# Altium PCB SFCMasterC.PcbDoc (part 2 of 2)
Units mm, origin at the board's own origin, x right, y up, seen from the top; angles counter-clockwise.
Board outline 152.4 x 101.6 mm, 2 copper layers (Top Layer, Bottom Layer); 178 components, 163 nets, 627 pads, 271 vias.
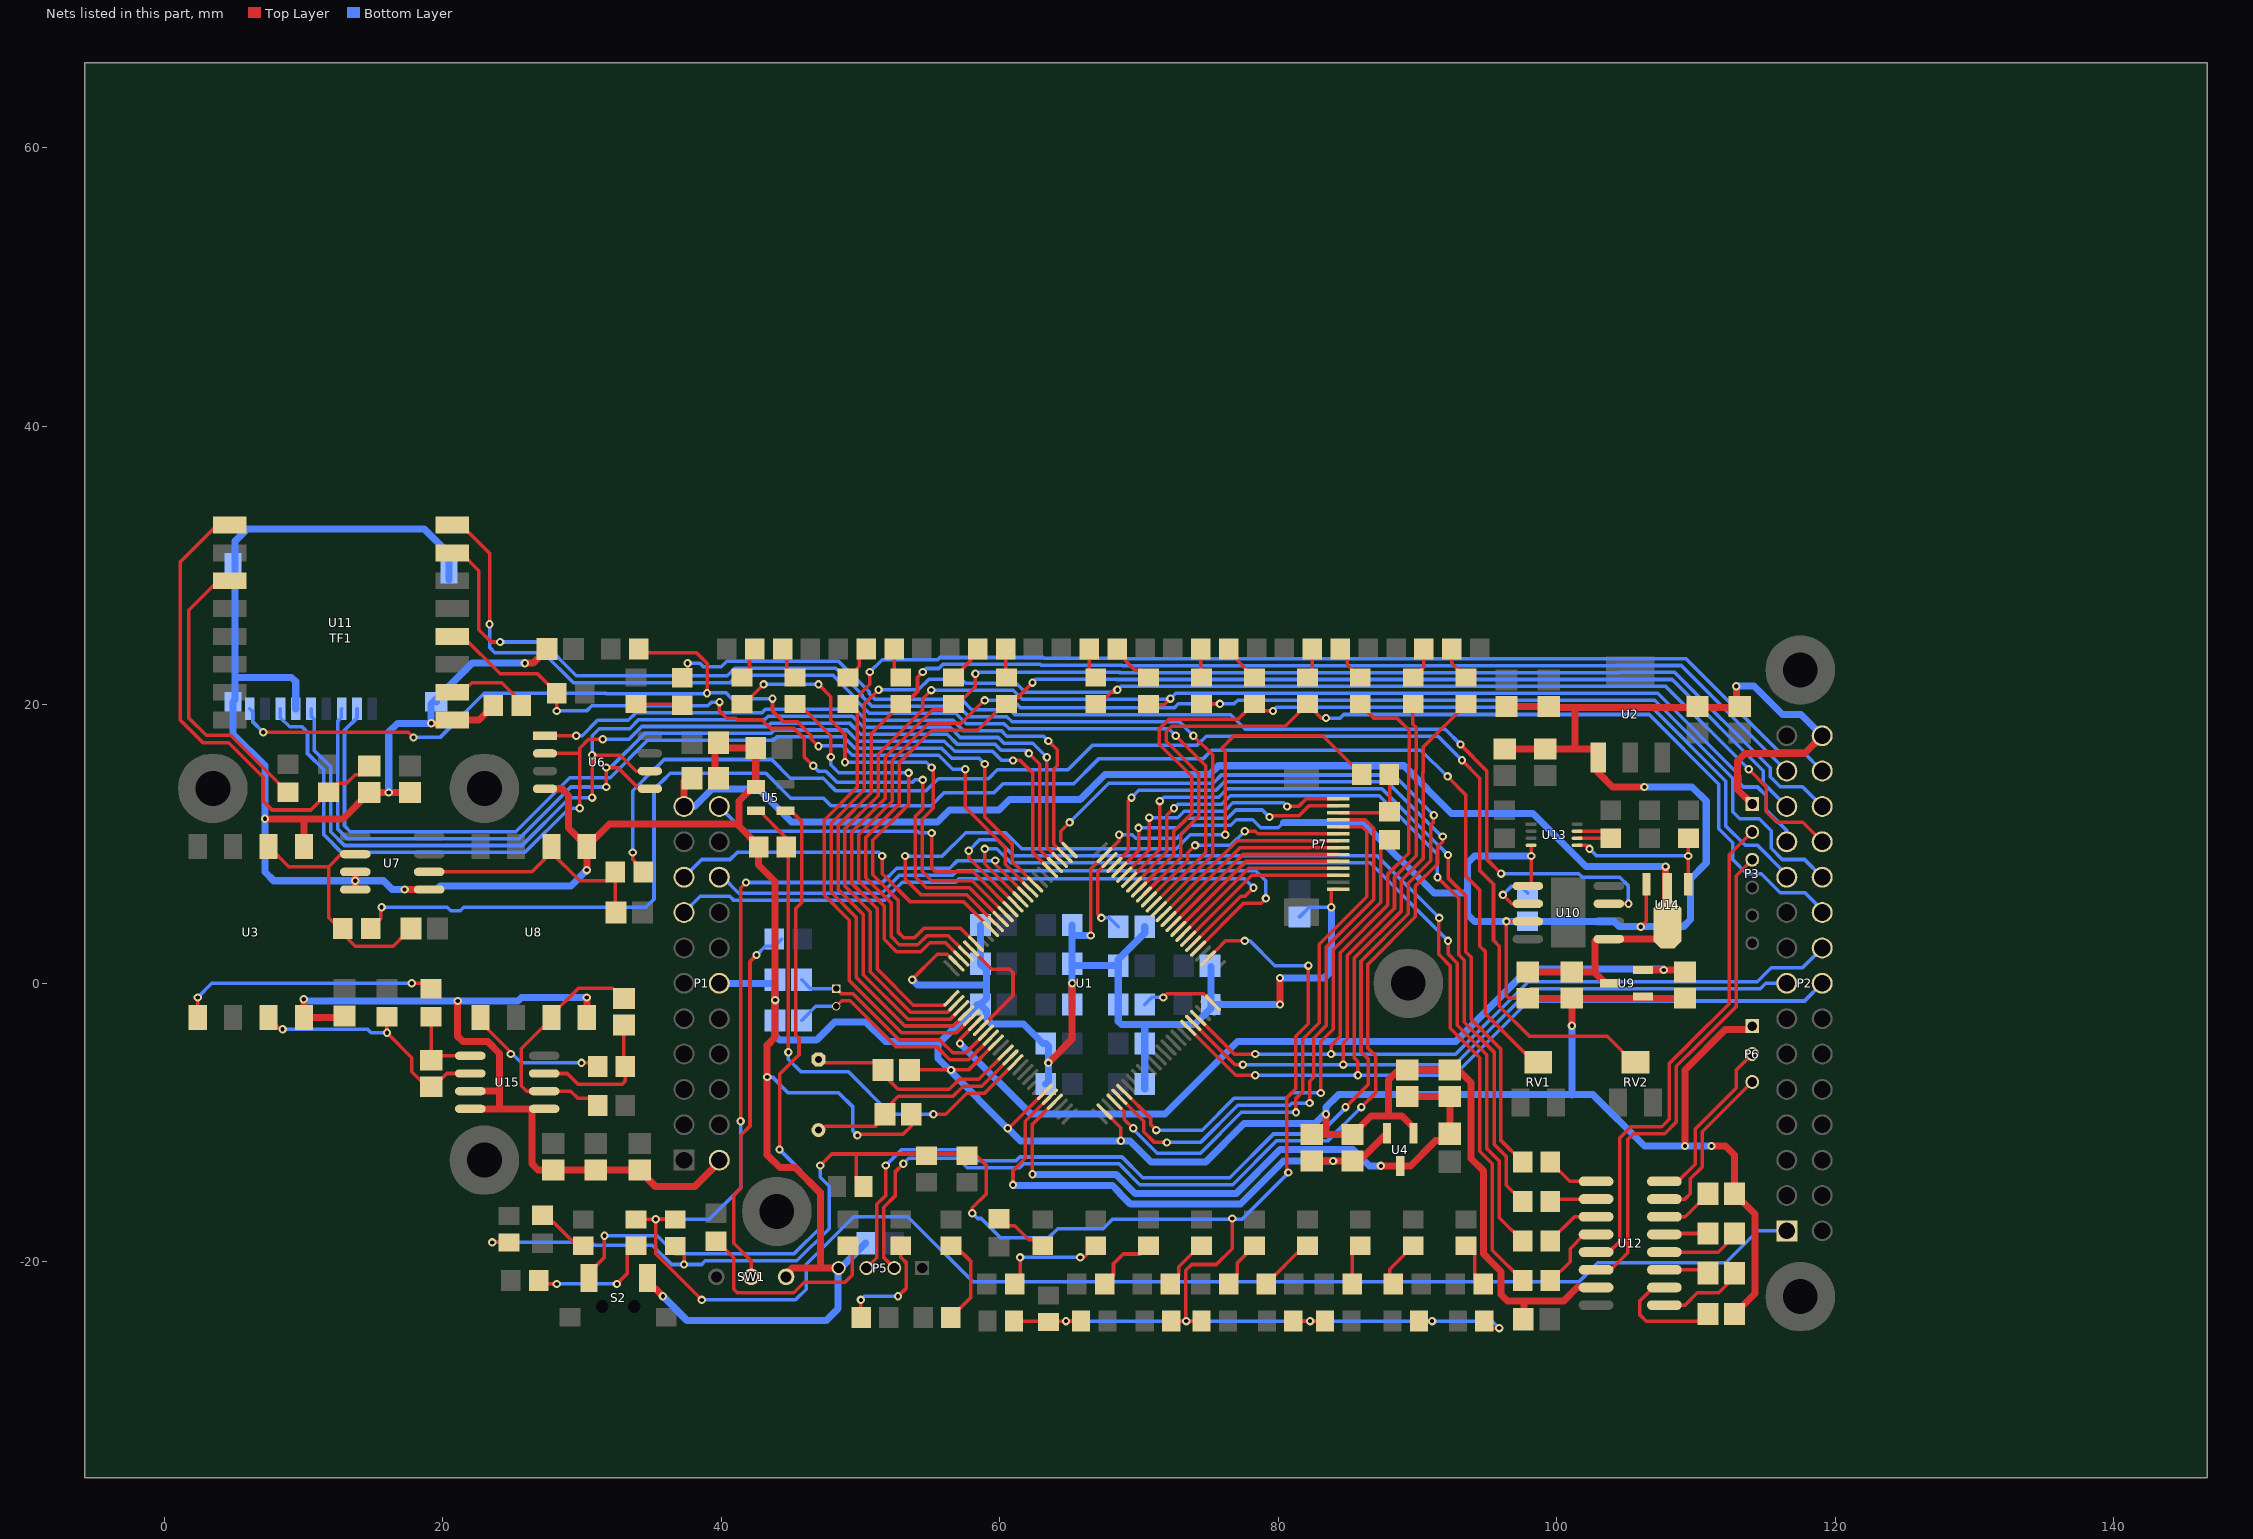
[diagram p2: the nets of this part, all layers, seen from the top]

## Via types
v1: diameter 0.6, hole 0.3, Top Layer to Bottom Layer, 269 vias
v2: diameter 1, hole 1, Top Layer to Bottom Layer, 2 vias

## Nets (pads, with @x,y where several pads share a name; then routed paths per layer and width w, separated by ;. In a path a pad name is that pad's centre, name@x,y a point inside that pad or via, vN(x,y) a via of type N, cw(c..) or ccw(c..) an arc to the next point about the centre after c; other vN are vias at no path point) (continued)
GND: C1.2 C2.2 C3.1 C4.1 C5.1 C6.1 C7.1 C8.1 C9.1 C10.1 C11.1 C12.1 C13.1 C14.1 C15.1 C16.1 C17.1 C18.1 C19.1 C20.2 C24.2 C28.1 C29.1 C30.1 C31.1 C32.2 C33.2 C34.2 C35.2 C36.1 C37.1 C39.1 C43.2 C50.2 C51.2 C52.2 C53.2 C54.2 C56.1 C58.2 C59.2 C60.2 P1.12 P2.30 P3.1 P5.4 P6.1 P7.1 R3.2 R5.2 R56.1 R65.1 S2.1 SW1.3 TF1.6 TF1.10 U1.10 U1.20 U1.27 U1.74 U1.99 U2.1 U3.5 U4.3 U5.1 U6.4 U7.3 U7.4 U7.5 U8.5 U9.1 U10.1 U10.3 U11.9 U12.15 U13.4 U14.3 | length 638.9
  Top Layer w0.254: v1(49.784,-10.922) 49.686,-10.824 53.087,-10.824 53.655,-10.256 C33.2@53.655,-9.906 ; C32.2@53.655,-6.731 54.163,-6.223 57.762,-6.223 U1.10@59.724,-4.26 ; v1@53.706,0.269 53.708,0.269 55.525,2.086 56.242,2.086 U1.99@56.896,1.432 ; v1@60.61,-10.445 U1.20@63.26,-7.796 ; v1@66.557,3.438 66.557,8.228 67.538,9.209 U1.74@67.538,9.21 67.608,9.28 67.609,9.28 68.58,10.251 v1(68.58,10.668) ; U1.27@67.538,-9.21 68.707,-10.379 v1(68.707,-11.303) ; v1@83.82,5.334 v1(83.82,5.461) 83.82,6.75 P7.1@84.325,6.75 ; v1@96.393,4.461 v1(96.393,4.445) ; C52.2@97.917,-1.077 97.917,-1.397 97.597,-1.077 96.581,-1.077 96.393,-0.889 v1(96.393,4.445) ; U10.3@97.93,4.445 v1(96.393,4.445) ; U10.1@98.171,7.112 U13.4@98.171,9.906 ; v1(106.045,4.064) 106.426,4.445 106.426,6.731 106.323,6.834 U14.3@106.323,7.107
  Top Layer w0.5: C43.2@39.685,16.891 C37.1@42.484,16.891 ; v1(83.439,-9.398) 83.439,-10.861 C29.1@82.423,-10.861 C28.1@85.344,-10.861 86.68,-9.525 87.91,-9.525 ; U4.3@89.723,-10.763 89.723,-10.348 88.9,-9.525 87.91,-9.525 ; C15.1@97.668,-24.13 97.668,-22.804 ; U12.15@102.772,-21.844 101.473,-21.844 100.513,-22.804 96.464,-22.804 96.012,-22.352 96.012,-20.701 95.009,-19.698 95.009,-19.673 94.764,-19.428 94.764,-13.484 93.853,-12.573 93.853,-7.112 92.964,-6.223 C30.1@89.281,-6.223 88.646,-6.223 87.91,-6.959 87.91,-9.525 ; v1(109.22,-11.684) 109.22,-6.223 112.141,-3.302 113.824,-3.302 P6.1@114.046,-3.08 P6.1@114.163,-3.08 ; v1(111.125,-11.684) 112.137,-11.684 112.776,-12.323 C58.2@112.776,-15.113 114.239,-16.576 114.239,-22.286 C56.1@112.776,-23.749 ; C16.1@112.903,19.812 v1(112.903,21.336)
  Top Layer w0.508: v1(7.239,11.811) 12.838,11.811 C51.2@14.732,13.705 C50.2@17.653,13.705 ; U3.5@10.033,9.833 10.033,11.805 ; U7.4@13.729,6.731 v1(13.729,7.366) U7.3@13.729,8.001 ; v1(17.272,6.731) U7.5@19.037,6.731 ; C50.2@17.526,13.716 C50.2@18.161,13.716 ; v1(19.177,18.669) 19.177,18.654 U11.9@20.954,18.654 ; U11.9@21.209,18.685 21.066,18.542 U11.9@20.954,18.654 ; R56.1@23.638,19.939 22.607,18.908 U11.9@20.7,18.908 U11.9@20.954,18.654 ; v1(25.908,22.987) 26.482,22.987 C20.2@27.498,24.003 ; U6.4@27.347,13.97 28.575,13.97 29.046,13.499 29.046,11.14 U8.5@30.353,9.833 ; v1(30.353,8.128) U8.5@30.353,9.833 ; S2.1@34.707,-21.16 34.707,-21.372 v1(35.814,-22.479) ; C24.2@39.558,14.859 C43.2@39.558,17.272 ; 41.275,11.451 31.971,11.451 U8.5@30.353,9.833 ; C37.1@42.484,16.891 42.484,14.29 41.275,13.081 41.275,11.295 42.688,9.882 42.688,8.493 43.881,7.3 v1(43.881,-1.206) 43.881,-3.871 43.307,-4.445 43.307,-12.319 44.219,-13.231 45.304,-13.231 47.149,-15.076 47.149,-20.447 ; SW1.3@44.664,-21.082 44.664,-20.868 45.085,-20.447 47.149,-20.447 ; P5.4@48.435,-20.447 47.149,-20.447 ; v1(63.5,-5.715) 65.212,-4.003 v1(65.212,0) ; v1(80.137,-1.524) v1(80.137,0.381) ; C59.2@96.266,16.825 C60.2@99.187,16.825 101.266,16.825 ; C19.1@96.393,19.878 C18.1@99.441,19.878 ; C52.2@97.917,-1.077 C54.2@101.092,-1.077 ; C18.1@99.441,20.193 99.695,19.939 99.949,19.939 100.076,19.812 101.332,19.812 ; v1(101.092,-3.048) C54.2@101.092,-1.077 ; v1(106.299,14.097) 104.013,14.097 102.983,15.127 U2.1@102.983,16.204 102.983,16.825 101.266,16.825 ; C53.2@109.22,-1.077 C54.2@101.092,-1.077 ; C16.1@113.157,19.812 101.332,19.812 ; P3.1@114.046,12.874 112.993,13.927 112.993,15.965 113.538,16.51 117.8,16.51 P2.30@119.07,17.78 ; 101.266,16.825 101.332,16.891 101.332,19.812
  Bottom Layer w0.254: v1(43.307,-6.731) 43.688,-6.731 44.831,-7.874 48.458,-7.874 49.466,-8.883 49.466,-10.604 v1(49.784,-10.922) ; v1(60.579,-10.414) v1@60.706,-10.541 ; v1(68.58,10.668) 69.519,10.668 69.773,10.414 72.741,10.414 73.686,11.359 76.607,11.359 76.988,11.74 78.176,11.74 78.74,11.176 80.01,11.176 80.391,11.557 ; C12.1@75.118,1.27 C12.1@75.168,1.22 ; C39.1@81.534,4.765 82.23,5.461 v1(83.82,5.461)
  Bottom Layer w0.5: v1@56.388,-6.223 v1(60.579,-10.414) ; v1@60.706,-10.541 61.492,-11.327 69.366,-11.327 70.866,-12.827 74.803,-12.827 77.564,-10.066 82.644,-10.066 83.439,-9.271 83.439,-8.89 84.328,-8.001 102.616,-8.001 106.299,-11.684 v1(111.125,-11.684) ; v1(112.903,21.336) 114.173,21.336 116.205,19.304 117.546,19.304 P2.30@119.07,17.78
  Bottom Layer w0.508: TF1.6@9.45,19.715 9.45,21.665 9.144,21.971 5.08,21.971 ; v1(16.129,13.705) 16.129,18.034 16.749,18.654 19.177,18.654 v1(19.177,18.669) 19.177,20.066 TF1.10@19.55,20.439 ; TF1.10@19.55,20.215 TF1.10@19.55,20.439 ; TF1.10@20.447,28.956 20.447,30.861 18.669,32.639 5.969,32.639 5.08,31.75 5.08,21.971 ; v1(25.908,22.987) 22.098,22.987 TF1.10@19.55,20.439 ; v1(30.353,8.128) 29.21,6.985 19.812,6.985 19.558,6.731 16.383,6.731 15.748,7.366 v1(13.729,7.366) 7.874,7.366 7.239,8.001 v1(7.239,11.811) 7.239,15.621 4.95,17.91 TF1.10@4.95,20.215 5.08,20.345 5.08,21.971 ; v1(35.814,-22.479) 37.565,-24.23 47.525,-24.23 48.387,-23.368 48.387,-20.64 C36.1@50.358,-18.669 ; P1.12@39.87,0 43.881,0 v1(43.881,-1.206) C35.2@43.881,-2.667 43.881,-3.749 44.196,-4.064 46.863,-4.064 48.133,-2.794 50.419,-2.794 51.816,-4.191 55.372,-4.191 55.562,-4.381 ; v1(53.721,0.254) 54.102,-0.127 59.055,-0.127 ; v1@56.388,-6.223 55.562,-5.397 55.562,-4.381 ; C13.1@58.613,4.191 C14.1@58.613,1.397 59.055,0.955 59.055,-0.127 ; C10.1@63.312,-7.239 63.5,-7.051 63.5,-4.506 C4.1@63.312,-4.318 63.119,-4.318 61.722,-2.921 59.436,-2.921 59.055,-2.54 59.055,-1.966 C9.1@58.613,-1.524 ; C3.1@65.212,-1.778 C3.1@65.212,-1.524 v1(65.212,0) C7.1@65.212,4.191 65.212,3.429 v1(66.548,3.429) ; C8.1@65.339,1.27 C6.1@68.519,1.27 C2.2@68.519,-1.524 68.519,-2.733 68.744,-2.958 74.004,-2.958 75.168,-1.794 R3.2@75.168,-1.524 ; C6.1@68.519,1.27 68.519,1.717 70.419,3.617 C1.2@70.419,4.064 ; C11.1@70.419,-7.595 C11.1@70.419,-7.239 C5.1@70.419,-4.318 70.419,-2.958 ; C12.1@75.168,1.22 R3.2@75.168,-1.524 ; v1(80.137,-1.524) R3.2@75.168,-1.524 ; v1(80.137,0.381) 83.312,0.381 83.82,0.889 v1(83.82,5.461) ; 80.391,11.557 86.106,11.557 91.186,6.477 93.599,6.477 ; v1(98.171,9.144) 94.107,9.144 93.599,8.636 93.599,6.477 ; 101.092,-8.001 v1(101.092,-3.048) ; v1(106.299,14.097) 109.728,14.097 110.744,13.081 110.744,8.636 109.601,7.493 109.601,4.572 109.093,4.064 v1(106.045,4.064) 104.521,4.064 104.14,4.445 v1(96.393,4.445) 94.107,4.445 93.599,4.953 93.599,6.477 ; 55.562,-4.381 58.42,-1.524 C9.1@58.613,-1.524 ; C9.1@58.613,-1.524 59.055,-1.082 59.055,-0.127
  other v1: 56.515,-6.223
GNDA: C23.1 C27.1 C38.1 C40.1 P1.2 U3.4 U8.4 U15.3 U15.4 U15.5 | length 61.7
  Top Layer w0.254: P1.2@39.87,-12.835 P1.2@39.87,-12.7
  Top Layer w0.508: v1(10.033,-1.143) U3.4@10.033,-2.467 12.707,-2.467 C23.1@12.827,-2.347 ; v1(21.082,-1.27) 21.082,-3.81 21.463,-4.191 23.241,-4.191 24.093,-5.043 24.093,-7.747 ; U15.4@21.984,-9.017 24.13,-9.017 ; U15.3@21.984,-7.747 24.093,-7.747 ; U8.4@30.353,-2.413 v1(30.353,-1.016) ; P1.2@39.87,-12.835 38.1,-14.605 35.306,-14.605 34.097,-13.396 26.858,-13.396 26.416,-12.954 26.416,-9.017 24.13,-9.017 ; 24.093,-7.747 24.093,-8.98 24.13,-9.017
  Bottom Layer w0.508: v1(10.033,-1.143) 10.033,-1.27 25.4,-1.27 25.654,-1.016 v1(30.353,-1.016)
KEY_DOWN: P7.4 U1.58 | length 13.1
  Top Layer w0.254: U1.58@73.195,3.553 77.29,7.648 77.291,7.648 77.893,8.25 P7.4@84.325,8.25
KEY_ENTER: P7.8 U1.62 | length 14.7
  Top Layer w0.254: U1.62@71.781,4.967 75.176,8.363 75.18,8.363 77.066,10.249 81.208,10.249 81.209,10.25 P7.8@84.325,10.25
KEY_INT: P7.9 U1.65 | length 16
  Top Layer w0.254: U1.65@70.72,6.028 73.506,8.814 73.506,9.371 v1(74.041,9.906) ; v1(77.597,10.922) 78.359,10.922 78.531,10.75 P7.9@84.325,10.75
  Bottom Layer w0.254: v1(74.041,9.906) 76.581,9.906 v1(77.597,10.922)
KEY_LEFT: P7.5 U1.59 | length 13.5
  Top Layer w0.254: U1.59@72.841,3.907 77.081,8.147 77.084,8.147 77.687,8.75 P7.5@84.325,8.75
KEY_RIGHT: P7.6 U1.60 | length 13.9
  Top Layer w0.254: U1.60@72.488,4.26 72.489,4.26 76.875,8.646 76.878,8.646 77.482,9.25 P7.6@84.325,9.25
KEY_UP: P7.3 U1.57 | length 12.7
  Top Layer w0.254: U1.57@73.548,3.2 78.099,7.75 P7.3@84.325,7.75
LCD_RESET: P7.7 U1.61 | length 14.3
  Top Layer w0.254: U1.61@72.134,4.614 75.384,7.864 75.387,7.864 77.273,9.75 P7.7@84.325,9.75
NetC1_1: C1.1 U1.73 | length 6.1
  Top Layer w0.254: v1(67.31,4.699) 67.056,4.953 67.056,8.021 U1.73@67.891,8.857
  Bottom Layer w0.254: v1(67.31,4.699) 67.884,4.699 C1.1@68.519,4.064
NetC2_1: C2.1 U1.49 | length 5.5
  Top Layer w0.254: v1(71.755,-1.016) 72.009,-0.762 74.646,-0.762 U1.49@75.316,-1.432
  Bottom Layer w0.254: C2.1@70.419,-1.524 70.927,-1.016 v1(71.755,-1.016)
NetC21_1: C21.1 R23.1 U8.3 U15.6 | length 18.9
  Top Layer w0.254: R23.1@31.004,-8.89 31.004,-8.398 30.861,-8.255 29.718,-8.255 29.21,-7.747 26.035,-7.747 25.654,-7.366 25.654,-4.699 27.813,-2.54 U8.3@27.813,-2.467 27.813,-2.286 29.755,-0.344 32.221,-0.344 33.02,-1.143 C21.1@33.02,-1.463
NetC21_2: C21.2 R21.1 U15.7 | length 9.9
  Top Layer w0.254: U15.7@27.305,-6.477 28.956,-6.477 29.718,-7.239 32.893,-7.239 33.131,-7.001 R21.1@33.131,-5.969 33.02,-5.858 C21.2@33.02,-3.363
NetC22_1: C22.1 R22.2 U3.6 U7.2 | length 18.1
  Top Layer w0.254: U3.6@7.493,9.833 8.944,8.382 11.811,8.382 ; U7.2@13.729,9.271 12.7,9.271 11.811,8.382 ; C22.1@17.719,3.556 17.338,3.556 16.449,2.667 13.732,2.667 12.843,3.556 12.843,3.667 11.811,4.699 11.811,8.382
NetC25_1: C25.1 R20.1 U3.3 U15.2 | length 18.7
  Top Layer w0.254: U3.3@7.493,-2.467 8.328,-3.302 v1(8.509,-3.302) ; R20.1@16.002,-2.397 v1(16.002,-3.556) 17.78,-5.334 17.78,-6.35 18.857,-7.427 C25.1@19.177,-7.427 19.353,-7.427 20.303,-6.477 U15.2@21.984,-6.477
  Bottom Layer w0.254: v1(8.509,-3.302) 14.605,-3.302 14.859,-3.556 v1(16.002,-3.556)
NetC25_2: C25.2 R19.1 U15.1 | length 6.1
  Top Layer w0.254: R19.1@19.177,-2.397 C25.2@19.177,-5.527 19.497,-5.207 U15.1@21.984,-5.207
NetC26_1: C26.1 R24.2 U7.6 U8.6 | length 18.4
  Top Layer w0.254: U7.6@19.037,8.001 26.416,8.001 U8.6@27.813,9.398 ; U8.6@27.813,9.833 U8.6@27.813,9.398 ; C26.1@32.451,5.08 32.401,5.13 R24.2@32.401,8.001 31.766,7.366 29.845,7.366 U8.6@27.813,9.398
NetC51_1: C51.1 R51.2 U11.1 | length 34.6
  Top Layer w0.254: U11.1@4.7,32.908 3.825,32.908 1.143,30.226 1.143,18.923 2.794,17.272 4.628,17.272 7.111,14.789 7.111,13.082 7.747,12.446 10.541,12.446 12.446,14.351 13.081,14.351 13.716,14.986 14.113,14.986 C51.1@14.732,15.605
NetC55_1: C55.1 U12.1 | length 6.2
  Top Layer w0.254: U12.1@107.672,-23.114 109.22,-23.114 110.109,-22.225 111.633,-22.225 112.776,-21.082 C55.1@112.776,-20.828
NetC55_2: C55.2 U12.3 | length 3.2
  Top Layer w0.254: U12.3@107.733,-20.574 110.622,-20.574 C55.2@110.876,-20.828
NetC56_2: C56.2 U12.2 | length 8.4
  Top Layer w0.254: U12.2@107.733,-21.844 106.934,-21.844 105.984,-22.794 105.984,-23.815 106.426,-24.257 110.368,-24.257 C56.2@110.876,-23.749
NetC57_1: C57.1 U12.5 | length 3.2
  Top Layer w0.254: U12.5@107.672,-17.968 C57.1@110.876,-17.968
NetC57_2: C57.2 U12.4 | length 5.8
  Top Layer w0.254: U12.4@107.672,-19.304 111.616,-19.304 112.776,-18.144 C57.2@112.776,-17.968
NetC58_1: C58.1 U12.6 | length 3.9
  Top Layer w0.254: U12.6@107.672,-16.764 109.225,-16.764 C58.1@110.876,-15.113
NetD1_1: D1.1 R4.1 | length 4.2
  Top Layer w0.254: R4.1@26.797,-16.653 27.289,-17.145 27.94,-17.145 29.645,-18.85 D1.1@30.1,-18.85
NetD2_1: D2.1 R6.1 | length 9
  Top Layer w0.254: R6.1@26.908,-21.336 27.162,-21.59 v1(28.194,-21.59) ; v1(32.512,-21.59) 33.274,-20.828 33.274,-19.476 D2.1@33.9,-18.85
  Bottom Layer w0.254: v1(28.194,-21.59) v1(32.512,-21.59)
NetD3_1: D3.1 R7.1 | length 15.4
  Top Layer w0.254: R7.1@39.624,-18.526 39.709,-18.526 40.894,-19.711 40.894,-21.971 41.148,-22.225 45.212,-22.225 45.974,-21.463 48.895,-21.463 49.403,-20.955 49.403,-19.153 D3.1@49.1,-18.85
NetD4_1: D4.1 R8.1 | length 8.9
  Top Layer w0.254: v1(50.038,-22.733) 50.038,-23.987 R8.1@50.054,-24.003 ; D4.1@52.451,-19.177 52.9,-18.728 D4.1@52.9,-18.85 52.9,-19.679 53.307,-20.086 53.307,-21.877 v1(52.705,-22.479)
  Bottom Layer w0.254: v1(50.038,-22.733) 50.292,-22.479 v1(52.705,-22.479)
NetD5_1: D5.1 R9.1 | length 6.5
  Top Layer w0.254: R9.1@56.499,-24.003 57.912,-22.59 57.912,-19.939 56.823,-18.85 D5.1@56.5,-18.85
NetD6_1: D6.1 R10.1 | length 4
  Top Layer w0.254: R10.1@59.944,-16.907 60.436,-17.399 61.087,-17.399 62.103,-18.415 62.665,-18.415 D6.1@63.1,-18.85 D6.1@63.043,-18.907
NetD7_1: D7.1 R11.1 | length 7.8
  Top Layer w0.254: R11.1@61.071,-21.59 61.468,-21.193 v1(61.468,-19.685) ; v1(65.786,-19.685) 66.065,-19.685 D7.1@66.9,-18.85
  Bottom Layer w0.254: v1(61.468,-19.685) v1(65.786,-19.685)
NetD8_1: D8.1 R26.2 | length 2.4
  Top Layer w0.254: D8.1@41.5,21.95 42.037,22.487 42.037,23.638 R26.2@42.402,24.003
NetD9_1: D9.1 R27.2 | length 2.4
  Top Layer w0.254: R27.2@44.407,24.003 44.704,23.706 44.704,22.546 D9.1@45.3,21.95
NetD10_1: D10.1 R28.2 | length 2.4
  Top Layer w0.254: D10.1@49.1,21.95 49.911,22.761 R28.2@49.911,24.003
NetD11_1: D11.1 R29.2 | length 2.3
  Top Layer w0.254: R29.2@52.418,24.003 52.418,22.432 D11.1@52.9,21.95
NetD12_1: D12.1 R30.2 | length 2.6
  Top Layer w0.254: D12.1@56.7,21.95 57.912,23.162 R30.2@57.912,24.003
NetD13_1: D13.1 R31.2 | length 2.1
  Top Layer w0.254: R31.2@60.429,24.003 60.429,22.021 D13.1@60.5,21.95
NetD14_1: D14.1 R38.2 | length 2.2
  Top Layer w0.254: R38.2@66.434,24.003 66.434,22.416 D14.1@66.9,21.95
NetD15_1: D15.1 R39.2 | length 3.3
  Top Layer w0.254: R39.2@68.44,24.003 68.44,23.762 69.723,22.479 70.171,22.479 D15.1@70.7,21.95
NetD16_1: D16.1 R40.2 | length 2.1
  Top Layer w0.254: R40.2@74.445,24.003 74.445,22.005 D16.1@74.5,21.95
NetD17_1: D17.1 R41.2 | length 2.8
  Top Layer w0.254: R41.2@76.45,24.003 76.45,23.8 D17.1@78.3,21.95
NetD18_1: D18.1 R42.2 | length 2.2
  Top Layer w0.254: D18.1@82.1,21.95 82.456,22.306 R42.2@82.456,24.003
NetD19_1: D19.1 R43.2 | length 2.6
  Top Layer w0.254: R43.2@84.461,24.003 84.963,23.501 84.963,22.887 D19.1@85.9,21.95
NetD20_1: D20.1 R48.2 | length 2.4
  Top Layer w0.254: D20.1@89.7,21.95 90.467,22.717 R48.2@90.467,24.003
NetD21_1: D21.1 R49.2 | length 2.5
  Top Layer w0.254: R49.2@92.472,24.003 92.472,22.978 D21.1@93.5,21.95
NetD24_1: D24.1 R12.1 | length 4.8
  Top Layer w0.254: R12.1@67.548,-21.59 67.564,-21.59 68.177,-20.977 68.177,-20.144 68.881,-19.44 70.11,-19.44 D24.1@70.7,-18.85
NetD25_2: D25.2 R54.1 | length 3.6
  Top Layer w0.254: D25.2@33.639,20.05 D25.2@33.9,20.05 R54.1@37.211,20.05
NetD26_1: D26.1 R13.1 | length 3.7
  Top Layer w0.254: R13.1@72.247,-21.59 72.867,-20.97 72.867,-20.351 D26.1@74.434,-18.784
NetD27_1: D27.1 R14.1 | length 3.5
  Top Layer w0.254: R14.1@76.438,-21.59 76.438,-21.479 77.067,-20.85 77.067,-20.083 D27.1@78.3,-18.85
NetD28_1: D28.1 R15.1 | length 4.1
  Top Layer w0.254: R15.1@79.137,-21.59 81.877,-18.85 D28.1@82.1,-18.85
NetD29_1: D29.1 R16.1 | length 3
  Top Layer w0.254: R16.1@85.328,-21.59 85.328,-19.422 D29.1@85.9,-18.85
NetD30_1: D30.1 R17.1 | length 3.4
  Top Layer w0.254: R17.1@88.027,-21.59 88.027,-20.523 D30.1@89.7,-18.85
NetD31_1: D31.1 R18.1 | length 3.1
  Top Layer w0.254: D31.1@93.5,-18.85 94.116,-19.466 94.116,-21.361 R18.1@94.345,-21.59
NetR2_2: R2.2 SW1.2 | length 26.6
  Top Layer w0.254: SW1.2@42.164,-21.082 42.164,-19.939 40.894,-18.669 40.894,-15.24 41.402,-14.732 41.402,-10.922 42.074,-10.25 42.074,1.561 v1(42.545,2.032)
  Bottom Layer w0.254: v1(42.545,2.032) 43.18,2.667 43.831,2.667 R2.2@44.339,3.175
NetR19_2: R19.2 U3.1 | length 18.8
  Top Layer w0.254: U3.1@2.413,-2.467 v1(2.413,-1.016) ; v1(17.78,0) 18.78,0 R19.2@19.177,-0.397
  Bottom Layer w0.254: v1(2.413,-1.016) 3.429,0 v1(17.78,0)
NetR21_2: R21.2 U8.1 | length 10.3
  Top Layer w0.254: U8.1@22.733,-2.467 22.733,-2.794 24.892,-4.953 v1(24.892,-5.08) ; v1(29.972,-5.715) 30.877,-5.715 R21.2@31.131,-5.969
  Bottom Layer w0.254: v1(24.892,-5.08) 24.892,-4.953 25.654,-5.715 v1(29.972,-5.715)
NetR22_1: R22.1 RV1.2 | length 114.5
  Top Layer w0.254: R22.1@14.843,3.556 R22.1@14.843,3.937 15.557,4.651 15.557,5.397 15.621,5.334 v1(15.621,5.461) ; v1@92.138,14.859 93.472,13.525 93.472,7.705 94.461,6.716 94.461,6.702 94.469,6.694 94.469,2.672 94.887,2.254 94.887,-2.177 98.372,-5.662 RV1.2@98.679,-5.662
  Bottom Layer w0.254: v1(15.621,5.461) 20.32,5.461 20.574,5.207 21.265,5.207 21.51,5.452 34.591,5.452 35.179,6.04 35.179,13.926 35.74,14.487 35.752,14.487 36.339,15.074 43.219,15.074 44.995,13.298 47.352,13.298 47.894,12.756 55.082,12.756 56.023,13.697 59.61,13.697 60.246,14.333 60.267,14.333 60.268,14.332 65.319,14.332 66.918,15.931 66.922,15.931 67.101,16.11 74.606,16.11 75.242,16.746 90.251,16.746 92.138,14.859 v1(92.17,14.859)
NetR24_1: R24.1 RV2.2 | length 100
  Top Layer w0.254: v1(33.655,9.398) 33.655,8.89 34.401,8.144 R24.1@34.401,8.001 ; v1(93.204,16.016) 94.488,14.732 94.488,8.1 95.459,7.129 95.459,7.115 95.467,7.107 95.467,3.085 95.885,2.667 95.885,-1.651 98.048,-3.814 103.636,-3.814 RV2.2@105.574,-5.752
  Bottom Layer w0.254: v1(33.655,9.398) 33.655,13.839 35.31,15.494 35.348,15.494 35.926,16.072 43.632,16.072 44.972,14.732 47.329,14.732 48.218,13.843 54.732,13.843 55.584,14.695 59.196,14.695 59.832,15.331 60.681,15.331 60.682,15.33 64.906,15.33 66.505,16.929 66.508,16.929 66.687,17.108 74.192,17.108 74.828,17.744 91.476,17.744 v1(93.204,16.016)
NetR53_2: R53.2 U11.3 | length 20.9
  Top Layer w0.254: U11.3@4.7,28.908 3.889,28.908 1.778,26.797 1.778,19.05 3.017,17.811 4.795,17.811 R53.2@8.89,13.716
NetR54_2: R54.2 U10.7 | length 82.2
  Top Layer w0.254: R54.2@37.211,21.955 37.592,22.336 v1(37.592,22.987) ; v1(93.091,17.145) 94.996,15.24 94.996,8.89 v1(96.012,7.874) ; U10.7@103.746,5.715 v1(105.156,5.715)
  Bottom Layer w0.254: v1(37.592,22.987) 38.481,22.987 38.735,22.733 40.005,22.733 40.405,23.133 48.434,23.133 50.636,20.931 50.636,20.804 51.058,20.382 55.368,20.382 55.37,20.384 57.271,20.384 58.007,19.648 60.73,19.648 61.102,19.276 76.609,19.276 77.642,18.243 91.993,18.243 v1(93.091,17.145) ; v1(96.012,7.874) 101.6,7.874 101.854,7.62 104.521,7.62 105.156,6.985 v1(105.156,5.715)
NetR56_2: R56.2 U11.10 | length 6.7
  Top Layer w0.254: U11.10@20.019,20.908 U11.10@20.7,20.908 21.416,20.908 22.098,21.59 24.257,21.59 25.638,20.209 R56.2@25.638,19.939
NetR57_2: R57.2 U12.11 | length 3.9
  Top Layer w0.254: R57.2@99.552,-18.5 101.288,-16.764 U12.11@102.772,-16.764
NetR58_2: R58.2 U12.12 | length 5.1
  Top Layer w0.254: R58.2@99.618,-21.336 100.965,-19.989 100.965,-19.05 101.981,-18.034 U12.12@102.772,-18.034
NetR59_2: R59.2 U12.10 | length 3.3
  Top Layer w0.254: R59.2@99.552,-15.663 99.721,-15.494 U12.10@102.772,-15.494
NetR60_1: R60.1 U12.9 | length 3.8
  Top Layer w0.254: R60.1@99.552,-12.827 100.949,-14.224 U12.9@102.772,-14.224
NetR62_2: R62.2 U13.6 U13.7 | length 5
  Top Layer w0.254: U13.6@101.473,10.414 103.87,10.414 103.87,10.446 103.394,10.922 U13.7@101.473,10.922
NetR65_2: R65.2 U10.2 | length 4.3
  Top Layer w0.254: v1(96.139,6.35) 96.774,5.715 U10.2@97.93,5.715
  Bottom Layer w0.254: v1(96.139,6.35) 96.774,6.985 97.393,6.985 R65.2@97.917,6.461
NetS2_2: S2.2 U5.3 | length 53.1
  Top Layer w0.254: S2.2@30.507,-21.16 30.507,-20.801 31.623,-19.685 v1(31.623,-18.133) ; v1(44.196,-11.938) 44.196,-6.538 45.593,-5.141 45.593,-3.951 45.366,-3.724 45.366,5.371 45.773,5.778 45.773,11.631 45.019,12.385 U5.3@44.611,12.385
  Bottom Layer w0.254: v1(31.623,-18.133) 35.405,-18.133 36.703,-19.431 45.234,-19.431 47.253,-17.412 47.253,-14.995 v1(44.196,-11.938)
PORT_INT: D32.1 D33.1 D34.1 D35.1 D36.1 D37.1 D38.1 D39.1 D40.1 D41.1 D42.1 D43.1 D44.1 D45.1 U1.53 | length 153
  Top Layer w0.254: v1(23.561,-18.603) D32.1@24.765,-18.603 ; D33.1@36.703,-18.857 37.338,-19.492 v1(37.338,-20.193) ; v1(47.117,-13.081) 47.94,-12.258 49.718,-12.258 ; D34.1@50.48,-14.859 49.718,-14.097 49.718,-12.258 ; D36.1@56.962,-12.258 49.718,-12.258 ; v1(58.039,-16.51) 58.039,-16.13 59.055,-15.114 59.055,-13.081 D36.1@58.214,-12.24 ; D37.1@61.148,-24.257 D39.1@65.471,-24.257 ; D40.1@72.324,-24.257 v1(73.406,-24.257) ; D41.1@74.615,-24.257 D41.1@74.488,-24.257 v1(73.406,-24.257) ; U1.53@74.963,1.785 75.586,2.409 76.225,3.048 v1(77.597,3.048) ; v1@76.708,-16.764 76.708,-19.05 75.565,-20.193 73.787,-20.193 73.366,-20.614 73.366,-24.217 v1(73.406,-24.257) ; v1(80.735,-13.589) 80.608,-13.462 80.608,-8.236 81.261,-7.583 81.261,-3.815 82.169,-2.907 v1(82.169,1.27) ; D42.1@81.468,-24.257 D43.1@83.251,-24.257 ; D44.1@90.231,-24.257 v1@91.099,-24.257 ; D45.1@94.803,-24.257 95.311,-24.765 v1(95.885,-24.765)
  Bottom Layer w0.254: v1(23.561,-18.603) 30.668,-18.603 30.87,-18.805 35.061,-18.805 36.449,-20.193 38.608,-20.193 38.871,-19.93 45.441,-19.93 47.752,-17.619 47.752,-14.563 47.117,-13.928 v1(47.117,-13.081) ; v1@58.039,-16.491 58.439,-16.891 58.674,-16.891 60.072,-18.289 63.494,-18.289 64.166,-17.617 67.431,-17.617 68.12,-16.928 77.433,-16.928 v1@80.772,-13.589 ; v1(64.77,-24.257) v1(73.406,-24.257) v1(82.296,-24.257) v1(91.059,-24.257) 95.377,-24.257 v1(95.885,-24.765) ; v1(77.597,3.048) 77.978,3.048 79.756,1.27 v1@82.232,1.27
  other v1: 76.708,-16.891
RCC_OSC32_IN: C34.1 U1.8 Y2.1 | length 16
  Top Layer w0.254: Y2.1@48.26,-0.381 48.641,-0.762 49.474,-0.762 52.785,-4.073 55.706,-4.073 56.623,-4.99 57.58,-4.99 U1.8@59.017,-3.553
  Bottom Layer w0.254: C34.1@45.781,0.254 46.416,-0.381 Y2.1@48.26,-0.381
RCC_OSC32_OUT: C35.1 U1.9 Y2.2 | length 16.6
  Top Layer w0.254: Y2.2@48.26,-1.651 48.65,-1.261 49.267,-1.261 52.578,-4.572 55.499,-4.572 56.416,-5.489 57.787,-5.489 58.523,-4.753 58.525,-4.753 U1.9@59.371,-3.907
  Bottom Layer w0.254: C35.1@45.781,-2.667 46.797,-1.651 Y2.2@48.26,-1.651
RCC_OSC_IN: C32.1 U1.12 Y1.1 | length 15.5
  Top Layer w0.254: Y1.1@46.99,-5.715 51.054,-5.715 51.816,-6.477 51.816,-6.731 52.704,-7.619 56.389,-7.619 57.114,-6.894 58.503,-6.894 60.43,-4.967 U1.12@60.431,-4.967
RCC_OSC_OUT: C33.1 U1.13 Y1.2 | length 16.4
  Top Layer w0.254: Y1.2@46.99,-10.795 47.535,-10.25 51.091,-10.25 51.689,-9.652 51.689,-9.144 52.715,-8.118 56.652,-8.118 57.377,-7.393 58.71,-7.393 60.607,-5.496 60.609,-5.496 60.784,-5.321 U1.13@60.785,-5.321
RCT_AF: U1.7 U1.96 | length 9.3
  Top Layer w0.254: U1.96@57.516,2.93 57.519,2.93 U1.96@57.957,2.493 59.433,1.016 60.706,1.016 60.96,0.762 60.96,-0.903 U1.7@58.664,-3.2
RMT_STARTUP_IN: D2.2 D33.2 P2.1 U1.85 | length 146.6
  Top Layer w0.254: D2.2@33.909,-16.941 D2.2@33.9,-16.95 v1(35.306,-16.95) ; D33.2@37.084,-17.018 36.764,-17.018 D33.2@36.703,-16.957 36.696,-16.95 v1(35.306,-16.95) ; v1(38.608,-22.733) 35.306,-19.431 v1(35.306,-16.95) ; v1(41.402,-9.906) 41.402,6.858 v1(41.783,7.239) ; v1(59.69,8.816) 59.69,8.539 U1.85@61.846,6.383
  Bottom Layer w0.254: v1(35.306,-16.95) 39.156,-16.95 41.402,-14.704 v1(41.402,-9.906) ; v1(38.608,-22.733) 45.339,-22.733 46.11,-21.962 46.11,-20.184 49.53,-16.764 53.411,-16.764 58.093,-21.446 101.576,-21.446 102.947,-20.075 112.153,-20.075 114.448,-17.78 116.304,-17.78 116.53,-18.006 P2.1@116.53,-17.78 ; v1(41.783,7.239) 51.584,7.239 52.6,8.255 56.416,8.255 56.977,8.816 v1(59.69,8.816)
RS232_EXT_RXD1: P3.2 U12.13 | length 36.8
  Top Layer w0.254: U12.13@102.772,-19.37 103.693,-19.37 104.521,-18.542 104.521,-11.105 105.33,-10.296 107.56,-10.296 108.099,-9.757 108.099,-5.759 109.54,-4.318 109.54,-4.314 112.395,-1.458 112.395,9.223 P3.2@114.046,10.874
RS232_EXT_TXD1: P3.3 U12.14 | length 36.1
  Top Layer w0.254: U12.14@102.772,-20.574 103.886,-20.574 105.119,-19.341 105.119,-11.213 105.537,-10.795 107.767,-10.795 108.598,-9.964 108.598,-5.965 110.039,-4.525 110.039,-4.52 112.894,-1.665 112.894,7.722 P3.3@114.046,8.874
RS232_PC_RXD2: P6.2 U12.8 | length 12.3
  Top Layer w0.254: U12.8@107.733,-14.224 108.712,-14.224 109.954,-12.982 109.954,-10.466 112.903,-7.517 112.903,-6.223 P6.2@114.046,-5.08
RS232_PC_TXD2: P6.3 U12.7 | length 12
  Top Layer w0.254: U12.7@107.672,-15.494 109.22,-15.494 109.601,-15.113 109.601,-14.041 110.453,-13.189 110.453,-10.673 P6.3@114.046,-7.08
SPI1_LCD_A0: P7.13 U1.71 | length 19
  Top Layer w0.254: U1.71@68.599,8.149 69.977,9.528 v1(69.977,11.16) ; v1(79.375,11.938) 79.465,12.028 81.497,12.028 82.218,12.749 84.324,12.749 P7.13@84.325,12.75
  Bottom Layer w0.254: v1(69.977,11.16) 69.977,11.176 72.776,11.176 73.464,11.864 76.364,11.864 76.946,12.446 78.867,12.446 v1(79.375,11.938)
SPI1_LCD_BL: P7.14 U1.70 | length 19.2
  Top Layer w0.254: U1.70@68.952,7.796 70.739,9.583 v1(70.739,11.901) ; v1(80.645,12.7) 81.463,12.7 82.013,13.25 P7.14@84.325,13.25
  Bottom Layer w0.254: v1(70.739,11.901) 72.795,11.901 73.189,12.295 73.189,12.3 73.252,12.363 76.158,12.363 76.749,12.954 80.391,12.954 v1(80.645,12.7)
SPI1_LCD_MISO: R32.1 U1.31 | length 36.8
  Top Layer w0.254: U1.31@68.952,-7.796 70.866,-9.71 70.866,-10.16 v1(71.247,-10.541) ; v1(83.058,-7.874) 83.058,-4.191 83.947,-3.302 83.947,2.399 87.358,5.81 87.358,9.65 R32.1@88.011,10.303
  Bottom Layer w0.254: v1(71.247,-10.541) 74.549,-10.541 76.835,-8.255 80.589,-8.255 80.97,-7.874 v1(83.058,-7.874)
SPI1_LCD_MOSI: R25.1 U1.91 | length 52.5
  Top Layer w0.254: v1(53.213,9.144) 53.213,7.493 54.356,6.35 57.635,6.35 U1.91@59.724,4.26 ; v1(76.2,10.668) 76.2,16.637 75.946,16.891 76.835,17.78 83.201,17.78 R25.1@85.995,14.986 85.995,14.843 R25.1@86.233,14.605
  Bottom Layer w0.254: v1(53.213,9.144) 53.232,9.125 55.861,9.125 57.559,10.823 59.413,10.823 59.414,10.822 60.425,10.822 61.595,9.652 72.685,9.652 73.701,10.668 v1(76.2,10.668)
SPI1_LCD_NSS: P7.10 U1.29 | length 40.5
  Top Layer w0.254: U1.29@68.245,-8.503 68.961,-9.219 68.961,-9.779 v1(69.596,-10.414) ; v1(81.28,-9.271) 81.28,-8.269 81.76,-7.789 81.76,-4.021 82.94,-2.841 82.94,2.803 86.36,6.223 86.36,10.922 86.032,11.25 P7.10@84.325,11.25
  Bottom Layer w0.254: v1@69.596,-10.475 71.313,-12.192 74.422,-12.192 77.343,-9.271 v1(81.28,-9.271)
SPI1_LCD_SCK: P7.11 U1.30 | length 41.1
  Top Layer w0.254: U1.30@68.599,-8.149 70.358,-9.909 70.358,-10.668 71.12,-11.43 v1(72.009,-11.43) ; v1(82.259,-8.599) 82.259,-7.022 82.55,-6.731 82.55,-3.937 83.439,-3.048 83.439,2.596 86.859,6.016 86.859,11.129 86.238,11.75 P7.11@84.325,11.75
  Bottom Layer w0.254: v1(72.009,-11.43) 74.422,-11.43 77.089,-8.763 80.838,-8.763 81.002,-8.599 v1(82.259,-8.599)
SPI1_LCD_SDA: P7.12 R25.2 R32.2 | length 6.4
  Top Layer w0.254: P7.12@84.325,12.25 R32.2@88.011,12.25 ; R25.2@87.995,14.986 88.011,14.97 R32.2@88.011,12.303
SPI3_FLASH_NSS: U1.77 U6.1 | length 46.8
  Top Layer w0.254: U6.1@27.347,17.78 v1(29.591,17.78) ; v1(63.5,17.399) 64.135,16.764 64.135,15.621 63.891,15.377 63.891,11.421 ; U1.77@64.674,9.21 63.89,9.994 63.89,11.42 ; 63.89,11.42 63.891,11.421
  Bottom Layer w0.254: v1(29.591,17.78) 30.028,17.78 31.126,18.878 33.327,18.878 33.889,19.44 42.935,19.44 43.181,19.686 49.637,19.686 50.438,18.885 55.988,18.885 55.99,18.887 56.65,18.887 57.386,18.151 60.11,18.151 60.517,17.744 63.155,17.744 v1(63.5,17.399)
SPI3_MISO: TF1.7 U1.79 U6.2 | length 80.6
  Top Layer w0.254: U6.2@27.347,16.51 29.845,16.51 ; v1(29.845,12.573) 29.845,16.891 30.48,17.526 v1(31.496,17.526) ; v1(62.103,16.51) 62.893,15.72 62.893,11.834 62.892,11.833 62.892,9.579 U1.79@63.967,8.503
  Bottom Layer w0.254: TF1.7@8.35,19.715 8.35,19.082 9.017,18.415 9.906,18.415 10.296,18.025 10.296,16.501 11.457,15.34 11.457,10.683 12.742,9.398 25.908,9.398 29.083,12.573 v1(29.845,12.573) ; v1(31.496,17.526) 33.387,17.526 34.303,18.442 43.348,18.442 43.594,18.688 49.223,18.688 50.024,17.887 56.239,17.887 56.973,17.153 59.696,17.153 60.103,16.746 61.867,16.746 v1(62.103,16.51)
SPI3_MOSI: TF1.3 U1.80 U6.5 | length 75.5
  Top Layer w0.254: v1(31.75,14.097) v1(31.75,15.494) 32.576,15.494 34.1,13.97 U6.5@34.883,13.97 ; v1(60.96,16.002) 61.468,16.002 62.394,15.076 62.394,12.041 62.393,12.04 62.393,9.37 U1.80@63.613,8.149
  Bottom Layer w0.254: TF1.3@12.75,19.715 12.709,19.674 12.709,19.059 12.455,18.805 12.455,11.096 13.155,10.396 25.495,10.396 29.196,14.097 v1(31.75,14.097) ; v1(31.75,15.494) 32.06,15.494 34.509,17.943 43.555,17.943 43.801,18.189 49.016,18.189 49.817,17.388 56.032,17.388 56.766,16.654 59.49,16.654 60.142,16.002 v1(60.96,16.002)
SPI3_SCK: TF1.5 U1.78 U6.6 | length 81.3
  Top Layer w0.254: v1(30.734,13.335) v1(30.734,16.383) 32.766,16.383 33.909,15.24 U6.6@34.883,15.24 ; v1(63.392,16.237) 63.392,11.627 63.391,11.626 63.391,9.786 U1.78@64.321,8.857
  Bottom Layer w0.254: TF1.5@10.55,19.715 10.55,19.168 10.795,18.923 10.795,16.708 11.956,15.547 11.956,10.89 12.949,9.897 25.701,9.897 29.139,13.335 v1(30.734,13.335) ; v1(30.734,16.383) 30.734,17.78 31.242,18.288 33.443,18.288 34.096,18.941 43.142,18.941 43.388,19.187 49.43,19.187 50.231,18.386 56.195,18.386 56.197,18.388 56.444,18.388 57.18,17.652 59.903,17.652 60.31,17.245 62.384,17.245 v1(63.392,16.237)
SPI3_TF_CD: R1.1 TF1.9 U1.84 | length 75.1
  Top Layer w0.254: v1(7.112,18.034) 17.526,18.034 v1(17.907,17.653) ; R1.1@34.091,24.003 34.345,23.749 38.227,23.749 38.989,22.987 v1(38.989,20.828) ; v1(43.688,20.447) 43.688,19.558 44.45,18.796 45.466,18.796 46.482,17.78 46.482,17.526 v1(46.99,17.018) v1@47.117,16.891 ; v1(57.531,15.367) 57.531,12.631 60.397,9.765 60.397,8.537 U1.84@62.199,6.735
  Bottom Layer w0.254: TF1.9@6.15,19.715 6.35,19.515 6.35,18.796 v1(7.112,18.034) ; v1(17.907,17.653) 19.812,17.653 22.987,20.828 31.75,20.828 31.769,20.809 38.97,20.809 39.026,20.865 40.349,20.865 40.767,20.447 v1(43.688,20.447) ; v1@47.117,17.074 48.72,17.074 49.411,16.383 55.626,16.383 56.642,15.367 v1(57.531,15.367)
SPI3_TF_NSS: TF1.2 U1.83 | length 68.7
  Top Layer w0.254: v1(58.928,15.748) 58.928,11.94 60.896,9.972 60.896,8.746 U1.83@62.553,7.089
  Bottom Layer w0.254: TF1.2@13.85,19.715 13.85,19.057 12.954,18.161 12.954,11.303 13.362,10.895 25.246,10.895 29.12,14.769 32.041,14.769 34.716,17.444 43.762,17.444 44.008,17.69 48.81,17.69 49.611,16.889 55.826,16.889 56.56,16.155 58.521,16.155 v1(58.928,15.748)
SUB_SYS_BOOTSEL: P1.22 U1.88 | length 25.5
  Top Layer w0.254: v1(55.118,10.795) 55.118,8.255 55.372,8.001 58.105,8.001 U1.88@60.785,5.321
  Bottom Layer w0.254: P1.22@39.87,12.7 41.657,10.913 54.111,10.913 54.229,10.795 v1(55.118,10.795)
SUB_SYS_RST: P1.17 U1.92 | length 25.8
  Top Layer w0.254: v1(51.562,9.144) 51.562,7.874 53.594,5.842 57.436,5.842 U1.92@59.371,3.907
  Bottom Layer w0.254: P1.17@37.33,7.62 38.6,8.89 40.64,8.89 41.148,9.398 51.308,9.398 v1(51.562,9.144)
SYS_NRST: R5.1 U1.14 U5.2 | length 38.8
  Top Layer w0.254: U5.2@42.738,12.385 U5.2@42.511,12.385 42.733,12.385 44.688,10.43 44.688,10.16 44.831,10.017 v1(44.831,-4.953) ; v1(55.245,-9.398) 56.134,-9.398 57.64,-7.892 58.917,-7.892 60.814,-5.995 60.815,-5.995 60.896,-5.914 60.899,-5.914 U1.14@61.139,-5.675
  Bottom Layer w0.254: v1(44.831,-4.953) 44.831,-5.447 45.752,-6.368 49.153,-6.368 52.183,-9.398 v1@55.372,-9.398
SYS_SWCLK: P5.3 U1.76 | length 100.8
  Top Layer w0.254: P5.3@50.435,-20.447 51.181,-19.701 51.181,-15.875 51.816,-15.24 v1(51.816,-13.081) ; v1(65.024,11.557) 64.897,11.684 65.151,11.684 64.389,10.922 64.389,10.202 U1.76@65.028,9.564 ; v1(84.836,-8.89) 86.487,-7.239 86.487,-5.461 85.952,-4.926 85.952,1.581 89.354,4.983 89.354,7.19 90.958,8.794 90.958,11.329 91.149,11.52 91.149,12.028 v1(91.186,12.065)
  Bottom Layer w0.254: v1(51.816,-13.081) 52.959,-11.938 57.094,-11.938 57.892,-12.736 61.178,-12.736 61.44,-12.474 68.791,-12.474 70.278,-13.961 76.524,-13.961 79.663,-10.822 82.965,-10.822 84.836,-8.951 v1(84.836,-8.89) ; v1(65.024,11.557) 64.897,11.684 65.151,11.684 67.826,14.359 75.331,14.359 75.931,14.959 88.292,14.959 v1(91.186,12.065)
SYS_SWDIO: P5.2 U1.72 | length 96.7
  Top Layer w0.254: P5.2@52.435,-20.447 51.68,-19.692 51.68,-16.082 52.488,-15.274 52.488,-13.552 v1(53.086,-12.954) ; U1.72@68.233,8.492 68.244,8.503 U1.72@68.245,8.503 ; U1.72@68.233,8.491 69.252,9.51 69.252,13.118 v1(69.469,13.335) ; v1(85.979,-8.89) 86.995,-7.874 86.995,-5.207 86.451,-4.663 86.451,1.374 89.853,4.776 89.853,6.983 91.466,8.596 91.466,9.805 91.821,10.16 v1@91.821,10.398
  Bottom Layer w0.254: v1(53.086,-12.954) 53.467,-12.573 57.023,-12.573 57.685,-13.235 61.441,-13.235 61.703,-12.973 68.585,-12.973 70.072,-14.46 76.731,-14.46 79.87,-11.321 83.548,-11.321 v1(85.979,-8.89) ; v1(69.469,13.335) 69.994,13.86 75.538,13.86 76.138,14.46 87.841,14.46 91.76,10.541 v1(91.821,10.541)
USART1_PC_RX: R60.2 U1.69 | length 53.8
  Top Layer w0.254: U1.69@69.306,7.442 71.501,9.638 v1(71.501,13.081) ; v1(92.202,9.215) 92.202,7.564 93.463,6.303 93.463,2.266 93.869,1.86 93.869,-2.598 96.003,-4.732 96.003,-11.294 97.536,-12.827 R60.2@97.552,-12.827
  Bottom Layer w0.254: v1(71.501,13.081) 71.781,13.361 75.744,13.361 76.344,13.961 87.456,13.961 91.149,10.268 91.149,10.263 91.543,9.869 91.548,9.869 v1(92.202,9.215)
USART1_PC_TX: R59.1 U1.68 | length 55.2
  Top Layer w0.254: U1.68@69.659,7.089 72.009,9.439 72.009,12.065 v1(72.517,12.573) ; v1(91.44,7.62) 92.964,6.096 92.964,2.06 93.37,1.654 93.37,-2.805 95.504,-4.939 95.504,-11.557 96.384,-12.437 96.384,-14.495 R59.1@97.552,-15.663
  Bottom Layer w0.254: v1(72.517,12.573) 72.806,12.862 75.951,12.862 76.551,13.462 87.249,13.462 90.65,10.061 90.65,10.056 91.336,9.37 91.341,9.37 91.44,9.271 v1(91.44,7.62)
USART2_EXT_RX: R58.1 U1.87 | length 70.4
  Top Layer w0.254: v1(57.785,9.525) 57.785,9.028 U1.87@61.139,5.675 ; v1(91.567,4.699) 91.694,4.699 91.53,4.535 91.53,2.082 92.372,1.24 92.372,-3.218 94.488,-5.334 94.488,-12.065 95.386,-12.963 95.386,-19.17 R58.1@97.552,-21.336
  Bottom Layer w0.254: v1(57.785,9.525) 58.584,10.324 59.206,10.324 59.207,10.323 59.839,10.323 61.018,9.144 87.122,9.144 v1(91.567,4.699)
USART2_EXT_TX: R57.1 U1.86 | length 64.5
  Top Layer w0.254: v1(58.928,9.652) 58.928,8.592 U1.86@61.492,6.028 ; v1(92.202,3.048) 92.202,2.116 92.871,1.447 92.871,-3.011 94.987,-5.127 94.987,-11.858 95.885,-12.756 95.885,-16.833 R57.1@97.552,-18.5
  Bottom Layer w0.254: v1(58.928,9.652) 59.804,9.652 60.811,8.645 86.605,8.645 v1(92.202,3.048)
USART6_WIFI_LINK: D8.2 U1.89 | length 34
  Top Layer w0.254: D8.2@41.516,20.066 41.783,20.066 42.164,20.447 42.164,20.574 v1(43.053,21.463) ; v1(46.99,21.463) 47.879,20.574 47.879,18.878 48.895,17.862 v1(48.895,15.875) ; v1(55.118,15.494) 55.245,15.367 55.245,12.573 54.446,11.774 54.446,8.038 55.118,7.366 58.033,7.366 U1.89@60.431,4.967
  Bottom Layer w0.254: v1(43.053,21.463) v1(46.99,21.463) ; v1(48.895,15.875) 54.737,15.875 v1(55.118,15.494)
USART6_WIFI_PROG: R61.2 U1.90 U11.12 | length 55.3
  Top Layer w0.254: U11.12@20.7,24.908 21.447,24.908 24.13,22.225 26.813,22.225 R61.2@28.21,20.828 ; v1(28.194,19.558) R61.2@28.194,20.828 ; v1(39.878,20.193) 39.878,19.558 40.408,19.028 41.043,19.028 41.148,18.923 42.926,18.923 43.552,18.297 45.259,18.297 45.974,17.582 45.974,16.256 v1(46.609,15.621) ; v1(54.483,14.605) 54.483,12.517 53.947,11.981 53.947,7.648 54.737,6.858 57.834,6.858 U1.90@60.078,4.614
  Bottom Layer w0.254: v1(28.194,19.558) 30.337,19.558 30.718,19.939 39.05,19.939 39.304,20.193 v1(39.878,20.193) ; v1(46.609,15.621) 46.99,15.24 47.527,15.24 48.326,14.441 53.745,14.441 53.909,14.605 v1(54.483,14.605) v1@54.483,14.478
USART6_WIFI_RX: U1.64 U11.16 | length 77
  Top Layer w0.254: U11.16@21.081,32.654 21.335,32.908 23.368,30.875 v1(23.368,25.781) ; U1.64@71.073,5.675 74.794,9.395 74.794,15.63 v1(72.644,17.78)
  Bottom Layer w0.254: v1(23.368,25.781) 23.368,24.13 23.749,23.749 27.234,23.749 29.393,21.59 40.64,21.59 41.185,22.135 48.02,22.135 49.638,20.517 49.638,20.39 50.644,19.384 55.782,19.384 55.784,19.386 56.857,19.386 57.593,18.65 60.316,18.65 60.688,18.278 72.146,18.278 v1(72.644,17.78)
USART6_WIFI_TX: U1.63 U11.15 | length 76
  Top Layer w0.254: U11.15@21.081,30.654 21.335,30.908 22.606,29.637 22.606,25.4 23.495,24.511 v1(24.13,24.511) ; U1.63@71.427,5.321 73.395,7.289 73.395,7.29 74.967,8.862 74.974,8.862 74.974,8.869 75.293,9.188 75.293,16.401 v1(73.914,17.78)
  Bottom Layer w0.254: v1(24.13,24.511) 27.178,24.511 29.6,22.089 40.433,22.089 40.978,22.634 48.227,22.634 50.137,20.724 50.137,20.597 50.851,19.883 55.575,19.883 55.577,19.885 57.064,19.885 57.8,19.149 60.523,19.149 60.895,18.777 72.917,18.777 v1(73.914,17.78)
USART_DP_LINK: D9.2 U1.95 | length 31.3
  Top Layer w0.254: D9.2@45.339,20.066 45.72,19.685 45.974,19.685 47.879,17.78 v1(47.879,16.256) ; v1(53.467,15.113) 53.467,12.84 50.89,10.263 50.89,7.784 52.705,5.969 52.705,3.683 53.123,3.265 53.882,3.265 54.554,3.937 57.219,3.937 U1.95@58.31,2.846
  Bottom Layer w0.254: v1@47.879,16.383 47.879,15.687 48.453,15.113 v1(53.467,15.113)
USART_DP_RX: P1.15 U1.56 | length 48.4
  Top Layer w0.254: U1.56@73.902,2.846 77.307,6.251 77.625,6.251 v1(78.232,6.858)
  Bottom Layer w0.254: P1.15@37.33,5.08 38.491,6.241 40.622,6.241 40.884,5.979 48.396,5.979 48.397,5.978 51.735,5.978 53.014,7.257 56.829,7.257 57.075,7.503 77.587,7.503 v1(78.232,6.858)
USART_DP_TX: P1.18 U1.55 | length 48.3
  Top Layer w0.254: U1.55@74.255,2.493 U1.55@74.255,2.493 77.513,5.752 78.777,5.752 v1(79.121,6.096)
  Bottom Layer w0.254: P1.18@39.87,7.62 40.132,7.62 41.274,6.478 48.603,6.478 48.604,6.477 51.528,6.477 52.807,7.756 56.622,7.756 56.957,8.091 78.396,8.091 79.121,7.366 v1(79.121,6.096)
VBAT: C53.1 U1.6 U9.2 | length 62
  Top Layer w0.254: v1(57.15,-4.318) 57.15,-4.006 U1.6@58.31,-2.846
  Top Layer w0.508: U9.2@106.204,0.95 109.093,0.95 C53.1@109.22,0.823
  Bottom Layer w0.508: v1(57.15,-4.318) 62.23,-9.398 71.882,-9.398 77.089,-4.191 92.756,-4.191 97.963,1.016 v1@107.696,1.016
  other v1: 107.696,0.95
VBAT_SRC: C24.1 C52.1 C54.1 P1.21 U9.3 U10.5 U14.2 | length 98
  Top Layer w0.508: P1.21@37.33,12.7 37.33,14.531 C24.1@37.658,14.859 ; C52.1@97.79,0.823 102.743,0.823 ; U9.3@103.854,0 103.505,0 102.743,0.762 102.743,3.048 102.87,3.175 107.823,3.175 v1(107.823,8.382)
  Bottom Layer w0.508: P1.21@37.33,12.7 38.1,12.7 39.349,13.949 42.688,13.949 45.043,11.594 55.536,11.594 56.389,12.447 59.951,12.447 60.711,13.207 65.785,13.207 67.384,14.806 67.388,14.806 67.567,14.985 75.072,14.985 75.708,15.621 89.027,15.621 92.456,12.192 98.298,12.192 102.108,8.382 v1(107.823,8.382)
VDDA: C30.2 C31.2 LR1.2 U1.22 U4.1 | length 44.9
  Top Layer w0.254: v1(62.357,-13.716) 62.357,-10.113 U1.22@63.967,-8.503
  Top Layer w0.508: v1(87.376,-13.113) 89.503,-13.113 91.313,-11.303 91.837,-11.303 LR1.2@92.329,-10.811 C31.2@92.329,-8.123 C30.2@89.281,-8.123
  Bottom Layer w0.508: v1(62.357,-13.716) 68.362,-13.716 69.732,-15.086 76.99,-15.086 80.129,-11.947 85.387,-11.947 86.553,-13.113 v1(87.376,-13.113)
VDECT_OUT: R63.1 U13.5 U14.1 | length 11.7
  Top Layer w0.254: U13.5@101.473,9.906 102.108,9.906 v1(102.362,9.652) ; U14.1@109.323,7.107 109.45,7.234 v1(109.45,9.144) 109.45,10.406 R63.1@109.474,10.43
  Bottom Layer w0.254: v1(102.362,9.652) 102.87,9.144 v1(109.45,9.144)
VDLY_DRIVER: D11.2 P2.27 U1.3 | length 99.3
  Top Layer w0.254: v1(54.483,22.352) 54.102,21.971 54.102,20.955 53.197,20.05 D11.2@52.9,20.05 50.782,17.932 50.782,13.684 48.395,11.297 48.395,6.751 50.21,4.936 50.21,0.619 53.396,-2.567 56.468,-2.567 U1.3@57.249,-1.785
  Bottom Layer w0.254: v1(54.483,22.352) 54.737,22.606 55.631,22.606 55.922,22.897 62.922,22.897 62.987,22.832 63.958,22.832 63.959,22.833 68.819,22.833 68.837,22.815 104.271,22.815 104.279,22.823 108.947,22.823 P2.27@116.53,15.24
VDRIVER_OUT1: D12.2 P2.26 U1.1 | length 98.3
  Top Layer w0.254: U1.1@56.542,-1.078 56.052,-1.569 53.809,-1.569 51.208,1.032 51.208,5.349 49.393,7.164 49.393,10.883 51.78,13.27 51.78,16.234 55.231,19.685 56.335,19.685 D12.2@56.7,20.05 ; D12.2@56.642,20.066 57.023,20.066 58.261,21.304 v1(58.261,22.225)
  Bottom Layer w0.254: v1(58.261,22.225) 58.293,22.225 58.411,22.343 61.105,22.343 61.115,22.333 64.164,22.333 64.165,22.334 68.612,22.334 68.63,22.316 104.478,22.316 104.485,22.324 108.491,22.324 115.344,15.471 115.344,14.839 116.065,14.118 117.652,14.118 P2.26@119.07,12.7
VDRIVER_OUT2: D13.2 P2.25 U1.97 | length 91.7
  Top Layer w0.254: U1.97@57.603,2.139 57.311,2.431 57.31,2.431 56.321,3.42 54.784,3.42 54.13,2.766 52.804,2.766 52.206,3.364 52.206,5.762 50.391,7.577 50.391,10.47 52.778,12.857 52.778,15.821 55.127,18.17 58.429,18.17 59.817,19.558 60.5,19.558 D13.2@60.5,20.05 D13.2@60.389,19.939 ; D13.2@60.5,19.939 60.706,19.939 v1(62.357,21.59)
  Bottom Layer w0.254: v1(62.357,21.59) 62.601,21.834 64.371,21.834 64.372,21.835 68.406,21.835 68.424,21.817 108.292,21.817 114.845,15.264 114.845,14.385 P2.25@116.53,12.7
VDRIVER_OUT3: D14.2 P2.24 U1.4 | length 109.1
  Top Layer w0.254: v1(51.308,21.082) 50.283,20.057 50.283,13.89 47.896,11.503 47.896,6.544 49.711,4.729 49.711,0.412 53.189,-3.066 56.676,-3.066 U1.4@57.603,-2.139 ; D14.2@66.9,20.05 67.167,20.05 68.199,21.082 v1(68.453,21.082) ; v1(113.792,15.367) 115.062,14.097 115.062,12.319 115.824,11.557 117.673,11.557 P2.24@119.07,10.16
  Bottom Layer w0.254: v1(51.308,21.082) 54.163,21.082 54.925,21.844 57.277,21.844 57.568,21.553 61.19,21.553 61.834,20.909 68.28,20.909 68.335,20.964 68.335,21.2 v1(68.453,21.082) 68.689,21.318 107.841,21.318 v1(113.792,15.367)
VDRIVER_OUT4: D15.2 P2.23 U1.2 | length 100.7
  Top Layer w0.254: v1(55.09,21.054) 54.483,20.447 54.483,19.643 51.281,16.441 51.281,13.477 48.894,11.09 48.894,6.957 50.709,5.142 50.709,0.825 53.602,-2.068 56.26,-2.068 U1.2@56.896,-1.432 ; D15.2@70.7,20.05 70.739,20.011 71.827,20.011 v1(72.263,20.447)
  Bottom Layer w0.254: v1(55.09,21.054) 60.983,21.054 61.627,20.41 72.226,20.41 v1(72.263,20.447) 72.635,20.819 107.253,20.819 113.157,14.915 113.157,14.351 113.411,14.097 114.427,14.097 115.062,13.462 115.062,12.446 116.53,10.978 P2.23@116.53,10.16
VDRIVER_OUT5: D16.2 P2.22 U1.98 | length 99.6
  Top Layer w0.254: U1.98@57.249,1.785 56.114,2.921 54.991,2.921 54.337,2.267 52.597,2.267 51.707,3.157 51.707,5.556 49.892,7.371 49.892,10.677 52.279,13.064 52.279,16.028 54.92,18.669 57.245,18.669 58.928,20.352 v1(58.928,20.32) ; D16.2@74.5,20.05 74.5,20.369 D16.2@74.676,20.193 ; D16.2@74.516,20.066 v1(75.819,20.066)
  Bottom Layer w0.254: v1(58.928,20.32) 60.96,20.32 61.505,19.775 72.541,19.775 72.832,20.066 76.835,20.066 77.089,20.32 107.047,20.32 112.649,14.718 112.649,12.319 113.157,11.811 114.554,11.811 115.408,10.957 115.408,9.695 116.213,8.89 117.8,8.89 P2.22@119.07,7.62
VDRIVER_OUT6: D17.2 P2.21 U1.67 | length 67.5
  Top Layer w0.254: U1.67@70.013,6.735 72.508,9.23 72.508,10.913 73.787,12.192 73.787,14.859 71.473,17.173 71.473,18.265 72.159,18.951 77.117,18.951 78.3,20.134 D17.2@78.3,20.05 78.792,19.558 v1(79.629,19.558)
  Bottom Layer w0.254: v1(79.629,19.558) 79.883,19.812 106.849,19.812 112.15,14.511 112.15,11.294 113.538,9.906 114.427,9.906 116.247,8.086 P2.21@116.247,7.337
VDRIVER_OUT7: D18.2 P2.20 U1.66 | length 71.3
  Top Layer w0.254: U1.66@70.366,6.382 73.007,9.022 73.007,10.706 74.295,11.994 74.295,15.057 71.972,17.38 71.972,18.058 72.366,18.452 80.502,18.452 D18.2@82.1,20.05 83.1,19.05 v1(83.439,19.05)
  Bottom Layer w0.254: v1(83.439,19.05) 84.455,19.05 84.709,19.304 106.651,19.304 111.651,14.304 111.651,11.087 112.649,10.089 112.649,8.89 113.665,7.874 114.689,7.874 116.065,6.498 117.835,6.498 119.07,5.263 P2.20@119.07,5.08
VDRIVER_OUT8: D19.2 P2.18 U1.46 | length 79.8
  Top Layer w0.254: U1.46@74.255,-2.493 76.843,-5.08 v1(78.359,-5.08) ; v1(83.802,-5.08) 83.802,-4.463 84.455,-3.81 84.455,2.201 87.857,5.603 87.857,7.81 89.389,9.342 89.389,15.551 89.408,15.57 89.408,18.161 88.551,19.018 86.9,19.018 86.233,19.685 85.471,19.685 85.9,20.114 D19.2@85.9,20.05
  Bottom Layer w0.254: v1(78.359,-5.08) 92.752,-5.08 97.95,0.118 114.418,0.118 115.422,1.122 117.652,1.122 P2.18@119.07,2.54
VDRIVER_OUT9: D20.2 P2.15 U1.45 | length 74.5
  Top Layer w0.254: U1.45@73.902,-2.846 76.898,-5.842 v1(77.47,-5.842) ; v1(84.682,-5.842) 84.682,-4.289 84.954,-4.017 84.954,1.994 88.356,5.396 88.356,7.603 89.907,9.154 89.907,14.355 89.888,14.374 89.888,15.344 89.907,15.363 89.907,18.368 89.671,18.604 89.671,20.021 D20.2@89.7,20.05
  Bottom Layer w0.254: v1(77.47,-5.842) 92.696,-5.842 98.157,-0.381 114.625,-0.381 115.006,0 P2.15@116.53,0
VDRIVER_OUT10: D21.2 P2.16 U1.44 | length 79.8
  Top Layer w0.254: U1.44@73.548,-3.2 76.953,-6.604 v1(78.359,-6.604) ; v1(85.725,-6.604) 85.725,-5.602 85.453,-5.33 85.453,1.788 88.855,5.19 88.855,7.397 90.406,8.948 90.406,14.562 90.387,14.581 90.387,15.137 90.406,15.156 90.406,16.956 D21.2@93.5,20.05
  Bottom Layer w0.254: v1(78.359,-6.604) 92.639,-6.604 97.964,-1.279 108.973,-1.279 108.982,-1.27 117.8,-1.27 P2.16@119.07,0
VMAIN_DRIVER: D10.2 P2.28 U1.5 | length 107.9
  Top Layer w0.254: D10.2@49.1,20.05 49.26,20.05 50.673,21.463 v1(50.673,22.352) ; D10.2@49.149,20.066 49.784,19.431 49.784,14.097 47.397,11.71 47.397,6.337 49.212,4.522 49.212,0.205 52.982,-3.565 56.884,-3.565 U1.5@57.957,-2.493
  Bottom Layer w0.254: v1(50.673,22.352) 51.562,23.241 55.56,23.241 55.715,23.396 63.129,23.396 63.194,23.331 63.751,23.331 63.752,23.332 69.026,23.332 69.036,23.322 109.266,23.322 115.93,16.658 117.652,16.658 P2.28@119.07,15.24
VREF: C28.2 C29.2 U1.21 U4.2 | length 38.5
  Top Layer w0.254: v1(60.96,-14.478) 60.96,-13.462 61.849,-12.573 61.849,-9.912 62.853,-8.908 62.855,-8.908 U1.21@63.613,-8.149
  Top Layer w0.508: C29.2@82.423,-12.761 C28.2@85.344,-12.761 85.825,-12.761 U4.2@87.823,-10.763
  Bottom Layer w0.508: v1(60.96,-14.478) 60.997,-14.515 68.096,-14.515 68.617,-15.036 68.617,-15.072 69.384,-15.839 77.302,-15.839 80.38,-12.761 v1(83.947,-12.761)
pads on no net: P7.A P7.B RV1.3 RV2.3 S2.0 TF1.1 TF1.8 U2.4 U3.7 U3.8 U8.7 U8.8 U10.9 U11.2 U11.4 U11.5 U11.6 U11.7 U11.11 U11.13 U11.14
copper on no net:
  other v2: 7.75,30.215 15.75,30.215

## Polygon pours and split planes (outlines as drawn)
GNDA on Bottom Layer "Bottom Layer-GNDA" (solid, remove dead copper, pour order 6): 19.147,-15.075 40.191,-15.075 40.572,-14.694 40.572,-9.741 40.191,-9.36 34.603,-9.36 34.603,1.435 0.432,1.435 0.432,-4.089 0.436,-4.093 11.116,-4.093 12.064,-4.093 17.458,-9.487
GND on Bottom Layer "Bottom Layer-GND" (solid, remove dead copper, pour order 8): 21.496,-25.373 120.496,-25.373 120.496,25.627 120.342,25.781 25.142,25.781 25.142,34.481 24.996,34.627 0.496,34.627 0.496,2.167 0.504,2.159 35.175,2.159 35.175,-8.636 40.509,-8.636 41.144,-9.271 41.144,-14.605 41.144,-14.831 40.509,-15.466 40.41,-15.367 19.368,-15.367 19.368,-23.244 21.496,-25.373
GND on Top Layer "Top Layer-GND" (solid, remove dead copper, pour order 7): 21.608,-25.357 120.608,-25.357 120.608,25.643 120.454,25.797 25.254,25.797 25.254,34.497 25.108,34.643 0.608,34.643 0.608,2.183 0.616,2.175 35.287,2.175 35.287,-8.62 40.621,-8.62 41.256,-9.255 41.256,-14.589 41.256,-14.815 40.621,-15.45 40.522,-15.351 19.48,-15.351 19.48,-23.228 21.608,-25.357
GNDA on Top Layer "Top Layer-GNDA" (solid, remove dead copper, pour order 5): 19.099,-15.059 40.143,-15.059 40.524,-14.678 40.524,-9.725 40.143,-9.344 34.555,-9.344 34.555,1.451 0.384,1.451 0.384,-4.073 0.388,-4.077 11.068,-4.077 12.016,-4.077 17.41,-9.471

## Keep-outs
Keep-Out Layer:
  lines w0.254: 11.184,-4.004 cw(c11.4,-10) 17.048,-7.975 ; 11.272,-4 0.5,-4 0.5,34.5 25,34.5 25,25.5 120.5,25.5 120.5,-25.5 38.989,-25.5 21.5,-25.5 21.5,-22.4 17.062,-8

## Silkscreen, mask and mechanical layers (free items; w line width, h text height)
Top Overlay:
  lines w0.2: 98.425,-6.55 108.585,-6.55 ; 100.01,-8.128 100.01,-5.207 ; 106.91,-7.239 106.91,-5.461
  lines w0.254: 0,33.655 0,42.5 25,42.5 25,33.655 ; 20,-14.875 20,-17 21.141,-17 ; 20,14.875 20,17 38.25,17 ; 113.03,0 121,0 ; 118,-17 121,-17
Bottom Overlay:
  lines w0.254: 49.53,25.527 49.53,7.747 120.523,7.747
Mechanical 15:
  lines w0.5: 113.284,1.397 115.189,1.397 117.348,1.397 117.602,1.651 117.602,6.096 115.443,6.096 113.284,6.096 113.284,1.397
  lines w0.508: 0.635,1.778 34.925,1.778 34.925,-9.017 40.386,-9.017 40.894,-9.525 40.894,-14.732 40.386,-15.24 19.254,-15.24

## Dimensions
38.989,-25.5 to 0.5,34.5 on Mechanical 15
120.5,-25.5 to 0.5,-4 on Mechanical 15

## Text inside footprints (layer, text, board x,y; h text height)
P1: Bottom Overlay "1" at 36.822,-15.24 h0.8 r270; Bottom Overlay "2" at 39.362,-15.24 h0.8 r270; Bottom Overlay "21" at 36.822,14.224 h0.8 r270; Bottom Overlay "22" at 39.362,14.224 h0.8 r270
P2: Bottom Overlay "1" at 115.316,-19.685 h0.8 r270; Bottom Overlay "2" at 119.38,-19.939 h0.8 r270; Bottom Overlay "29" at 114.554,19.304 h0.8 r270; Bottom Overlay "30" at 119.507,19.177 h0.8 r270